# Altium PCB PCBtc.PcbDoc (part 2 of 3)
Units mm, origin at the board's own origin, x right, y up, seen from the top; angles counter-clockwise.
Board outline 94.5 x 103.5 mm, 2 copper layers (Top Layer, Bottom Layer), stack 1.671 mm thick; 71 components, 63 nets, 236 pads, 46 vias.
Unrouted connection lines stored in the file: 2.
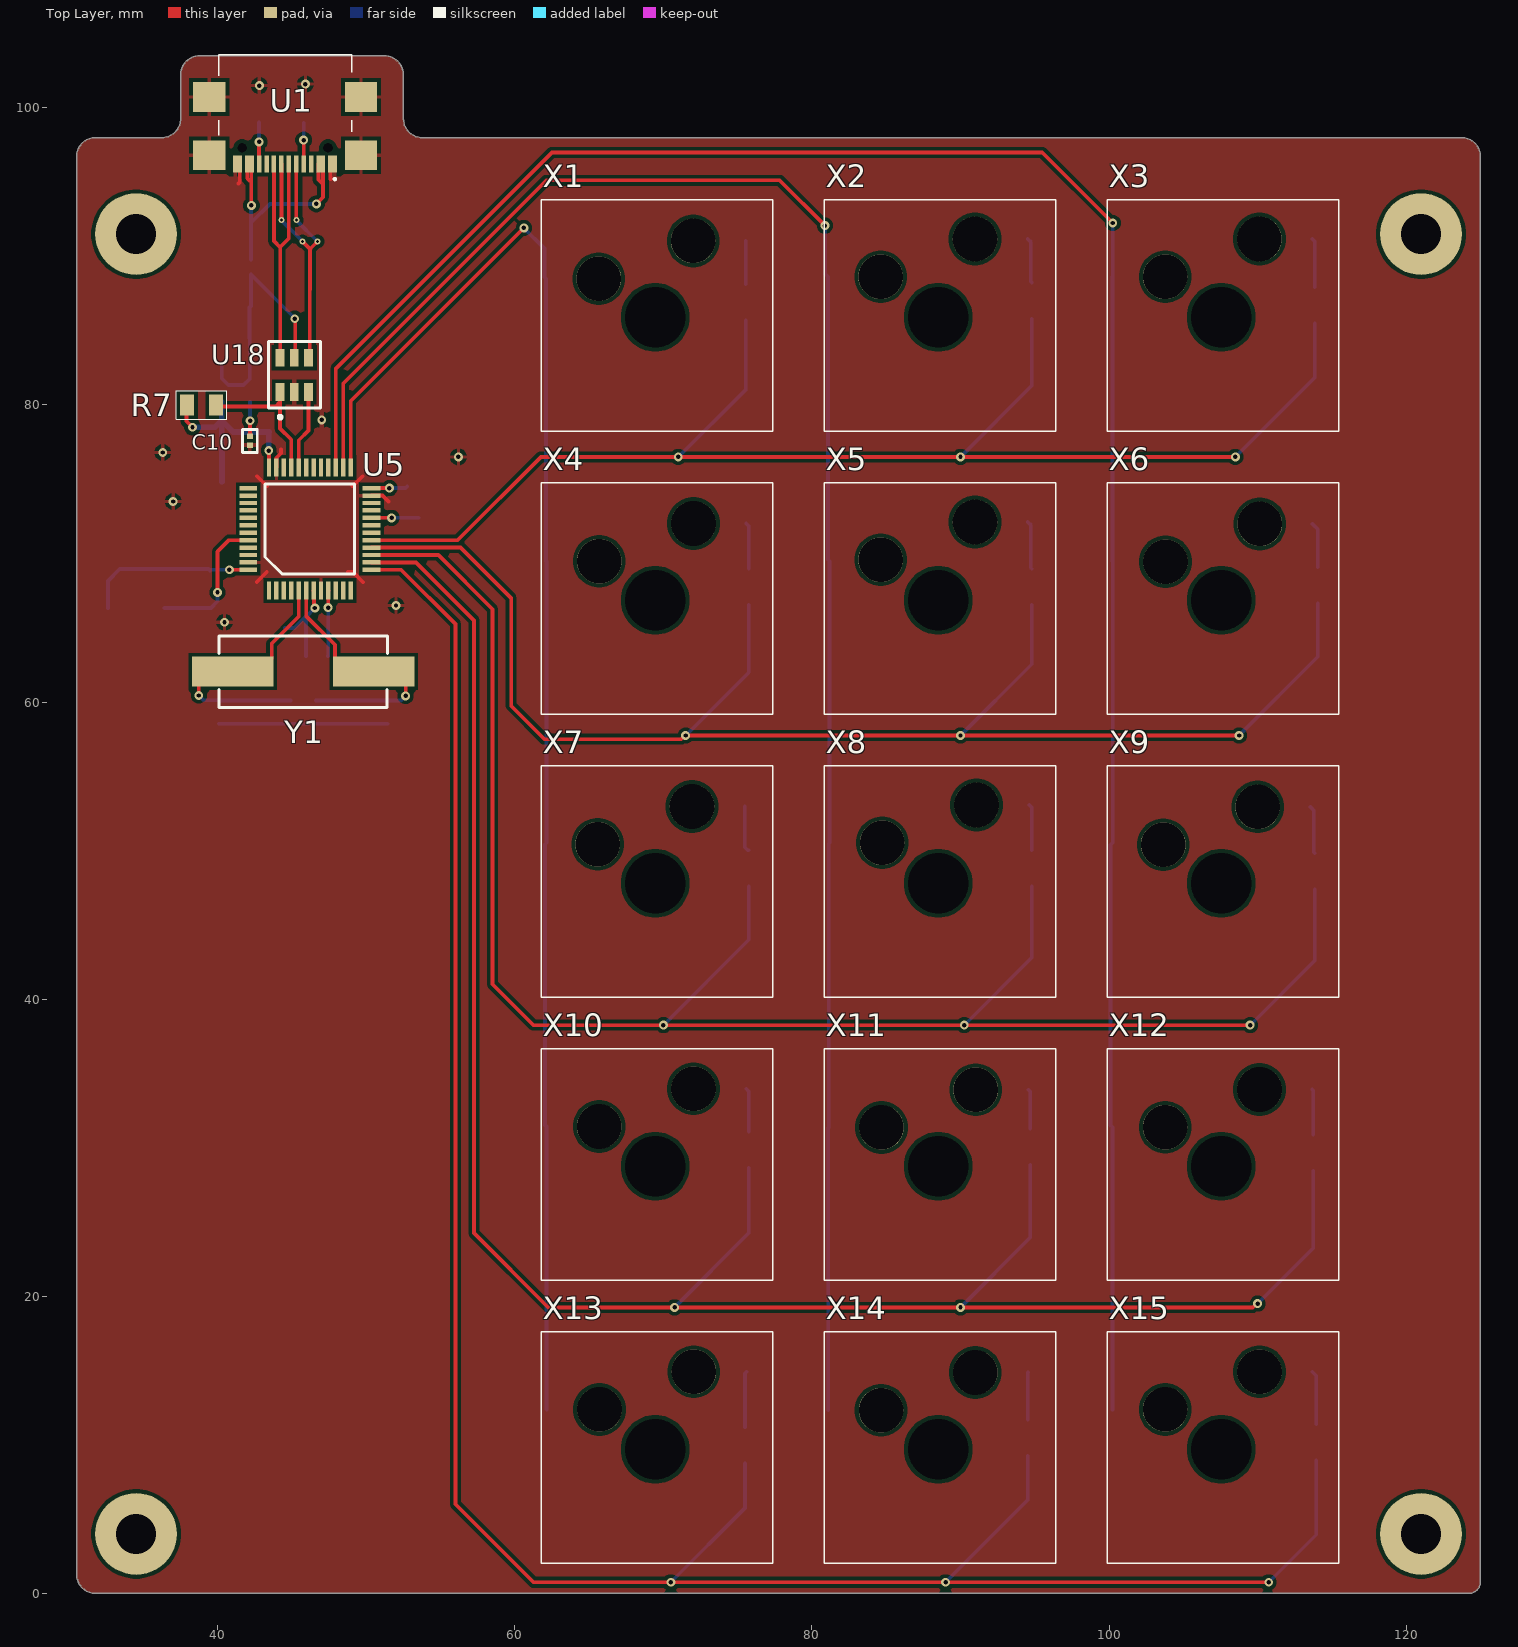
[diagram p0: Top Layer view]

## Part data (continued)
R1 R6: library part ERA-2AEB512X, "Res Thin Film 0402 5.1K Ohm 0.1% 0.063W ±25ppm/°C Molded SMD Punched Carrier T/R", Case Code (Imperial)=0402, Case Code (Metric)=1005, Manufacturer=Panasonic, Max Operating Temperature=155°C, Max Power Dissipation=63mW, Min Operating Temperature=-55°C, Supplier Part Number=P5.1KDCCT-ND, Temperature Coefficient=25ppm/°C, Tolerance=0.1%, Voltage Rating=25V, Working Voltage=50V, Case/Package=0402, Category="Chip SMD Resistors", China RoHS=Non-Compliant, ComponentLink1Description=https://datasheet.octopart.com:443/ERA-2AEB512X-Panasonic-datasheet-62287448.pdf?src-supplier=Newark, ComponentLink1URL=https://datasheet.octopart.com:443/ERA-2AEB512X-Panasonic-datasheet-62287448.pdf?src-supplier=Newark, ComponentLink2Description=https://datasheet.octopart.com:443/ERA-2AEB512X-Panasonic-datasheet-136531316.pdf?src-supplier=Newark, ComponentLink2URL=https://datasheet.octopart.com:443/ERA-2AEB512X-Panasonic-datasheet-136531316.pdf?src-supplier=Newark, ComponentLink3Description=https://datasheet.octopart.com:443/ERA-2AEB512X-Panasonic-datasheet-165151108.pdf?src-supplier=Newark, ComponentLink3URL=https://datasheet.octopart.com:443/ERA-2AEB512X-Panasonic-datasheet-165151108.pdf?src-supplier=Newark, ComponentLink4Description=https://datasheet.octopart.com:443/ERA-2AEB512X-Panasonic-datasheet-13266200.pdf?src-supplier=Future+Electronics, ComponentLink4URL=https://datasheet.octopart.com:443/ERA-2AEB512X-Panasonic-datasheet-13266200.pdf?src-supplier=Future+Electronics, ComponentLink5Description=https://datasheet.octopart.com:443/ERA-2AEB512X-Panasonic-datasheet-12510007.pdf?src-supplier=Future+Electronics, ComponentLink5URL=https://datasheet.octopart.com:443/ERA-2AEB512X-Panasonic-datasheet-12510007.pdf?src-supplier=Future+Electronics, ComponentLink6Description=https://datasheet.octopart.com:443/ERA-2AEB512X-Panasonic-datasheet-11763931.pdf?src-supplier=Future+Electronics, ComponentLink6URL=https://datasheet.octopart.com:443/ERA-2AEB512X-Panasonic-datasheet-11763931.pdf?src-supplier=Future+Electronics, ComponentLink7Description=https://datasheet.octopart.com:443/ERA-2AEB512X-Panasonic-datasheet-10840895.pdf?src-supplier=Future+Electronics, ComponentLink7URL=https://datasheet.octopart.com:443/ERA-2AEB512X-Panasonic-datasheet-10840895.pdf?src-supplier=Future+Electronics, ComponentLink8Description=https://datasheet.octopart.com:443/ERA-2AEB512X-Panasonic-datasheet-8367715.pdf?src-supplier=Future+Electronics, ComponentLink8URL=https://datasheet.octopart.com:443/ERA-2AEB512X-Panasonic-datasheet-8367715.pdf?src-supplier=Future+Electronics, ComponentLink9Description=https://datasheet.octopart.com:443/ERA-2AEB512X-Panasonic-datasheet-5392808.pdf?src-supplier=Future+Electronics, ComponentLink9URL=https://datasheet.octopart.com:443/ERA-2AEB512X-Panasonic-datasheet-5392808.pdf?src-supplier=Future+Electronics, ComponentLink10Description=https://datasheet.octopart.com:443/ERA-2AEB512X-Panasonic-datasheet-22087624.pdf?src-supplier=element14+APAC, ComponentLink10URL=https://datasheet.octopart.com:443/ERA-2AEB512X-Panasonic-datasheet-22087624.pdf?src-supplier=element14+APAC, ComponentLink11Description=https://datasheet.octopart.com:443/ERA-2AEB512X-Panasonic-datasheet-61114971.pdf?src-supplier=element14+APAC, ComponentLink11URL=https://datasheet.octopart.com:443/ERA-2AEB512X-Panasonic-datasheet-61114971.pdf?src-supplier=element14+APAC, ComponentLink12Description=https://datasheet.octopart.com:443/ERA-2AEB512X-Panasonic-datasheet-154766165.pdf?src-supplier=Master+Electronics, ComponentLink12URL=https://datasheet.octopart.com:443/ERA-2AEB512X-Panasonic-datasheet-154766165.pdf?src-supplier=Master+Electronics, ComponentLink13Description=https://datasheet.octopart.com:443/ERA2AEB512X-Panasonic-datasheet-188913046.pdf?src-supplier=TME, ComponentLink13URL=https://datasheet.octopart.com:443/ERA2AEB512X-Panasonic-datasheet-188913046.pdf?src-supplier=TME, ComponentLink14Description=https://sigma.octopart.com:443/150570796/technical_drawing/Panasonic-ERA2AEB512X.pdf?src-supplier=Panasonic+SCT, ComponentLink14URL=https://sigma.octopart.com:443/150570796/technical_drawing/Panasonic-ERA2AEB512X.pdf?src-supplier=Panasonic+SCT, ComponentLink15Description=https://datasheet.octopart.com/ERA-2AEB512X-Panasonic-datasheet-78375410.pdf, ComponentLink15URL=https://datasheet.octopart.com/ERA-2AEB512X-Panasonic-datasheet-78375410.pdf, ComponentLink16Description=https://datasheet.octopart.com:443/ERA-2AEB512X-Panasonic---ECG-datasheet-15994758.pdf?src-supplier=Farnell, ComponentLink16URL=https://datasheet.octopart.com:443/ERA-2AEB512X-Panasonic---ECG-datasheet-15994758.pdf?src-supplier=Farnell, ComponentLink17Description=https://datasheet.octopart.com:443/ERA-2AEB512X-Panasonic-datasheet-33006989.pdf?src-supplier=Electro+Sonic, ComponentLink17URL=https://datasheet.octopart.com:443/ERA-2AEB512X-Panasonic-datasheet-33006989.pdf?src-supplier=Electro+Sonic, ComponentLink18Description=https://datasheet.octopart.com:443/ERA-2AEB512X-Panasonic-datasheet-46744048.pdf?src-supplier=Electro+Sonic, ComponentLink18URL=https://datasheet.octopart.com:443/ERA-2AEB512X-Panasonic-datasheet-46744048.pdf?src-supplier=Electro+Sonic, Composition="Metal Film, Thin Film", Contact Plating=Tin, Depth=500µm, Height=350µm, Lead Free="Lead Free", Length=1mm, Lifecycle Status=Production, Manufacturer Part Number=ERA-2AEB512X, Military Standard=Not, Mounting Technology="Surface Mount", Number of Terminals=2, Number of Terminations=2, Packaging="Cut Tape", Power Dissipation=63mW, Power Rating=63mW, Pricing="1=0,1, 10=0,082, 25=0,076, 50=0,0716, 100=0,0677, 250=0,0628, 500=0,05944, 1000=0,05637, 5000=0,05032 (USD)", Radiation Hardening=No, REACH SVHC=Yes, RoHS=Compliant, Schedule B="8533210045, 8533210045|8533210045|8533210045|8533210045|8533210045", Stock=30801, Supplier=DigiKey, Termination=SMD/SMT, Voltage Rating (DC)=25V, Width=500µm
R2 R3 R4: library part CRCW060310K0FKEA, "100mW Thick Film Resistors ±1% ±100ppm/℃ 10kΩ 0603 Chip Resistor - Surface Mount ROHS", Case Code (Imperial)=0603, Manufacturer=Vishay, Max Operating Temperature=155°C, Max Power Dissipation=100mW, Min Operating Temperature=-55°C, Supplier Part Number=541-10.0KHCT-ND, Temperature Coefficient=100ppm/°C, Tolerance=1%, Voltage Rating=75V, Case/Package=0603, Category="Chip SMD Resistors", China RoHS=Non-Compliant, ComponentLink1Description=https://datasheet.octopart.com:443/CRCW060310K0FKEA-Vishay-datasheet-175423584.pdf?src-supplier=IHS, ComponentLink1URL=https://datasheet.octopart.com:443/CRCW060310K0FKEA-Vishay-datasheet-175423584.pdf?src-supplier=IHS, ComponentLink2Description=https://datasheet.octopart.com:443/CRCW060310K0FKEA-Vishay-datasheet-5300368.pdf?src-supplier=Future+Electronics, ComponentLink2URL=https://datasheet.octopart.com:443/CRCW060310K0FKEA-Vishay-datasheet-5300368.pdf?src-supplier=Future+Electronics, ComponentLink3Description=https://datasheet.octopart.com:443/CRCW060310K0FKEA-Vishay-datasheet-62316122.pdf?src-supplier=Upverter, ComponentLink3URL=https://datasheet.octopart.com:443/CRCW060310K0FKEA-Vishay-datasheet-62316122.pdf?src-supplier=Upverter, ComponentLink4Description=https://datasheet.octopart.com:443/CRCW060310K0FKEA-Vishay-datasheet-141434677.pdf?src-supplier=Upverter, ComponentLink4URL=https://datasheet.octopart.com:443/CRCW060310K0FKEA-Vishay-datasheet-141434677.pdf?src-supplier=Upverter, ComponentLink5Description=https://datasheet.octopart.com:443/CRCW060310K0FKEA-Vishay-datasheet-83961561.pdf?src-supplier=Newark, ComponentLink5URL=https://datasheet.octopart.com:443/CRCW060310K0FKEA-Vishay-datasheet-83961561.pdf?src-supplier=Newark, ComponentLink6Description=https://datasheet.octopart.com:443/CRCW060310K0FKEA-Vishay-datasheet-14722531.pdf?src-supplier=Newark, ComponentLink6URL=https://datasheet.octopart.com:443/CRCW060310K0FKEA-Vishay-datasheet-14722531.pdf?src-supplier=Newark, ComponentLink7Description=https://datasheet.octopart.com:443/CRCW060310K0FKEA-Vishay-datasheet-11516975.pdf?src-supplier=Newark, ComponentLink7URL=https://datasheet.octopart.com:443/CRCW060310K0FKEA-Vishay-datasheet-11516975.pdf?src-supplier=Newark, ComponentLink8Description=https://datasheet.octopart.com:443/CRCW060310K0FKEA-Vishay-datasheet-41302739.pdf?src-supplier=Newark, ComponentLink8URL=https://datasheet.octopart.com:443/CRCW060310K0FKEA-Vishay-datasheet-41302739.pdf?src-supplier=Newark, ComponentLink9Description=https://datasheet.octopart.com:443/CRCW060310K0FKEA-Vishay-datasheet-33013972.pdf?src-supplier=Newark, ComponentLink9URL=https://datasheet.octopart.com:443/CRCW060310K0FKEA-Vishay-datasheet-33013972.pdf?src-supplier=Newark, ComponentLink10Description=https://datasheet.octopart.com:443/CRCW060310K0FKEA-Vishay-datasheet-21226360.pdf?src-supplier=Newark, ComponentLink10URL=https://datasheet.octopart.com:443/CRCW060310K0FKEA-Vishay-datasheet-21226360.pdf?src-supplier=Newark, ComponentLink11Description=https://datasheet.octopart.com:443/CRCW060310K0FKEA-Vishay-datasheet-62317933.pdf?src-supplier=element14+APAC, ComponentLink11URL=https://datasheet.octopart.com:443/CRCW060310K0FKEA-Vishay-datasheet-62317933.pdf?src-supplier=element14+APAC, ComponentLink12Description=https://datasheet.octopart.com:443/CRCW060310K0FKEA-Vishay-datasheet-16179825.pdf?src-supplier=element14+APAC, ComponentLink12URL=https://datasheet.octopart.com:443/CRCW060310K0FKEA-Vishay-datasheet-16179825.pdf?src-supplier=element14+APAC, ComponentLink13Description=https://datasheet.octopart.com:443/CRCW060310K0FKEA-Vishay-datasheet-66077789.pdf?src-supplier=element14+APAC, ComponentLink13URL=https://datasheet.octopart.com:443/CRCW060310K0FKEA-Vishay-datasheet-66077789.pdf?src-supplier=element14+APAC, ComponentLink14Description=https://datasheet.octopart.com:443/CRCW060310K0FKEA-Vishay-datasheet-5306405.pdf?src-supplier=RS+(Formerly+Allied+Electronics), ComponentLink14URL=https://datasheet.octopart.com:443/CRCW060310K0FKEA-Vishay-datasheet-5306405.pdf?src-supplier=RS+(Formerly+Allied+Electronics), ComponentLink15Description=https://datasheet.octopart.com:443/CRCW060310K0FKEA-Vishay-Dale-datasheet-47688880.pdf?src-supplier=RS+(Formerly+Allied+Electronics), ComponentLink15URL=https://datasheet.octopart.com:443/CRCW060310K0FKEA-Vishay-Dale-datasheet-47688880.pdf?src-supplier=RS+(Formerly+Allied+Electronics), ComponentLink16Description=https://datasheet.octopart.com:443/CRCW060310K0FKEA-Vishay-datasheet-12001583.pdf?src-supplier=RS+(Formerly+Allied+Electronics), ComponentLink16URL=https://datasheet.octopart.com:443/CRCW060310K0FKEA-Vishay-datasheet-12001583.pdf?src-supplier=RS+(Formerly+Allied+Electronics), ComponentLink17Description=https://datasheet.octopart.com:443/CRCW060310K0FKEA-Vishay-datasheet-17834126.pdf?src-supplier=TME, ComponentLink17URL=https://datasheet.octopart.com:443/CRCW060310K0FKEA-Vishay-datasheet-17834126.pdf?src-supplier=TME, ComponentLink18Description=https://datasheet.octopart.com/D-CRCW-e3-Standard-Thick-Film-Chip-Resistors-Vishay-datasheet-family-64.pdf, ComponentLink18URL=https://datasheet.octopart.com/D-CRCW-e3-Standard-Thick-Film-Chip-Resistors-Vishay-datasheet-family-64.pdf, ComponentLink19Description=https://datasheet.octopart.com:443/CRCW060310K0FKEA-Vishay-datasheet-13242068.pdf?src-supplier=Farnell, ComponentLink19URL=https://datasheet.octopart.com:443/CRCW060310K0FKEA-Vishay-datasheet-13242068.pdf?src-supplier=Farnell, ComponentLink20Description=https://datasheet.octopart.com:443/CRCW060310K0FKEA-Vishay-datasheet-13195083.pdf?src-supplier=Farnell, ComponentLink20URL=https://datasheet.octopart.com:443/CRCW060310K0FKEA-Vishay-datasheet-13195083.pdf?src-supplier=Farnell, ComponentLink21Description=https://datasheet.octopart.com:443/CRCW060310K0FKEA-Vishay-datasheet-13034211.pdf?src-supplier=Farnell, ComponentLink21URL=https://datasheet.octopart.com:443/CRCW060310K0FKEA-Vishay-datasheet-13034211.pdf?src-supplier=Farnell, ComponentLink22Description=https://datasheet.octopart.com:443/CRCW060310K0FKEA-Vishay-datasheet-12600034.pdf?src-supplier=Farnell, ComponentLink22URL=https://datasheet.octopart.com:443/CRCW060310K0FKEA-Vishay-datasheet-12600034.pdf?src-supplier=Farnell, ComponentLink23Description=https://datasheet.octopart.com:443/CRCW060310K0FKEA-Vishay-datasheet-12532161.pdf?src-supplier=Farnell, ComponentLink23URL=https://datasheet.octopart.com:443/CRCW060310K0FKEA-Vishay-datasheet-12532161.pdf?src-supplier=Farnell, ComponentLink24Description=https://datasheet.octopart.com:443/CRCW060310K0FKEA-Vishay-datasheet-12517896.pdf?src-supplier=Farnell, ComponentLink24URL=https://datasheet.octopart.com:443/CRCW060310K0FKEA-Vishay-datasheet-12517896.pdf?src-supplier=Farnell, ComponentLink25Description=https://datasheet.octopart.com:443/CRCW060310K0FKEA-Vishay-datasheet-12509762.pdf?src-supplier=Farnell, ComponentLink25URL=https://datasheet.octopart.com:443/CRCW060310K0FKEA-Vishay-datasheet-12509762.pdf?src-supplier=Farnell, ComponentLink26Description=https://datasheet.octopart.com:443/CRCW060310K0FKEA-Vishay-datasheet-10322335.pdf?src-supplier=Farnell, ComponentLink26URL=https://datasheet.octopart.com:443/CRCW060310K0FKEA-Vishay-datasheet-10322335.pdf?src-supplier=Farnell, ComponentLink27Description=https://datasheet.octopart.com:443/CRCW060310K0FKEA-Vishay-datasheet-8788789.pdf?src-supplier=Farnell, ComponentLink27URL=https://datasheet.octopart.com:443/CRCW060310K0FKEA-Vishay-datasheet-8788789.pdf?src-supplier=Farnell, ComponentLink28Description=https://datasheet.octopart.com:443/CRCW060310K0FKEA-Vishay-datasheet-8361388.pdf?src-supplier=Farnell, ComponentLink28URL=https://datasheet.octopart.com:443/CRCW060310K0FKEA-Vishay-datasheet-8361388.pdf?src-supplier=Farnell, ComponentLink29Description=https://datasheet.octopart.com:443/CRCW060310K0FKEA-Vishay-datasheet-546287.pdf?src-supplier=Farnell, ComponentLink29URL=https://datasheet.octopart.com:443/CRCW060310K0FKEA-Vishay-datasheet-546287.pdf?src-supplier=Farnell, ComponentLink30Description=https://datasheet.octopart.com:443/CRCW060310K0FKEA-Vishay-datasheet-8619608.pdf?src-supplier=element14, ComponentLink30URL=https://datasheet.octopart.com:443/CRCW060310K0FKEA-Vishay-datasheet-8619608.pdf?src-supplier=element14, ComponentLink31Description=https://datasheet.octopart.com:443/CRCW060310K0FKEA-Vishay-datasheet-5377433.pdf?src-supplier=Garrett, ComponentLink31URL=https://datasheet.octopart.com:443/CRCW060310K0FKEA-Vishay-datasheet-5377433.pdf?src-supplier=Garrett, ComponentLink32Description=https://datasheet.octopart.com:443/CRCW060310K0FKEA-Vishay-datasheet-148188.pdf?src-supplier=Garrett, ComponentLink32URL=https://datasheet.octopart.com:443/CRCW060310K0FKEA-Vishay-datasheet-148188.pdf?src-supplier=Garrett, ComponentLink33Description=https://datasheet.octopart.com:443/CRCW060310K0FKEA-Vishay-datasheet-30224.pdf?src-supplier=Garrett, ComponentLink33URL=https://datasheet.octopart.com:443/CRCW060310K0FKEA-Vishay-datasheet-30224.pdf?src-supplier=Garrett, ComponentLink34Description=https://datasheet.octopart.com:443/CRCW060310K0FKEA-Vishay-datasheet-11835177.pdf?src-supplier=Arrow+Electronics, ComponentLink34URL=https://datasheet.octopart.com:443/CRCW060310K0FKEA-Vishay-datasheet-11835177.pdf?src-supplier=Arrow+Electronics, ComponentLink35Description=http://sigma.octopart.com:80/rohs_certificate/D-CRCW-e3-Standard-Thick-Film-Chip-Resistors-Vishay-family-102.pdf?src-supplier=Compliance+Statements, ComponentLink35URL=http://sigma.octopart.com:80/rohs_certificate/D-CRCW-e3-Standard-Thick-Film-Chip-Resistors-Vishay-family-102.pdf?src-supplier=Compliance+Statements, Composition="Thick Film", Contact Plating="Lead, Tin", Depth=850µm, Features="Automotive AEC-Q200", Height=450µm, Lead Free="Lead Free", Length=1.55mm, Lifecycle Status=Production, Manufacturer Part Number=CRCW060310K0FKEA, Military Standard=Not, Mounting Technology="Surface Mount", Number of Terminals=2, Number of Terminations=2, Packaging="Tape and Reel", Pins=2, Power Dissipation=100mW, Power Rating=100mW, Pricing="1=0,1, 10=0,03, 25=0,0224, 50=0,0182, 100=0,0149, 250=0,01172, 500=0,00986, 1000=0,00842 (USD)", Radiation Hardening=No, REACH SVHC=Yes, RoHS=Compliant, Schedule B="8533210045, 8533210045|8533210045|8533210045|8533210045|8533210045|8533210045|8533210045|8533210045|8533210045|8533210045|8533210045|8533210045|8533210045|8533210045|8533210045|8533210045|8533210045|8533210045|8533210045|8533210045|8533210045|8533210045|8533210045|85", Stock=1485347, Supplier=DigiKey, Termination=SMD/SMT, Voltage Rating (DC)=75V, Weight=2.012816mg, Width=850µm, Working Voltage=75V
R5: library part ERJ-3EKF1004V, "Res Thick Film 0603 1M Ohm 1% 1/10W ±100ppm/°C Molded SMD Punched Carrier T/R", Case Code (Imperial)=0603, Manufacturer=Panasonic, Max Operating Temperature=155°C, Max Power Dissipation=100mW, Min Operating Temperature=-55°C, Supplier Part Number=P1.00MHCT-ND, Temperature Coefficient=100ppm/°C, Tolerance=1%, Voltage Rating=75V, Case/Package=0603, Category="Chip SMD Resistors", China RoHS=Non-Compliant, ComponentLink1Description=https://sigma.octopart.com:443/138766958/technical_drawing/Panasonic-ERJ-3EKF1004V.pdf?src-supplier=Upverter, ComponentLink1URL=https://sigma.octopart.com:443/138766958/technical_drawing/Panasonic-ERJ-3EKF1004V.pdf?src-supplier=Upverter, ComponentLink2Description=https://datasheet.octopart.com:443/ERJ-3EKF1004V-Panasonic-datasheet-82288794.pdf?src-supplier=Future+Electronics, ComponentLink2URL=https://datasheet.octopart.com:443/ERJ-3EKF1004V-Panasonic-datasheet-82288794.pdf?src-supplier=Future+Electronics, ComponentLink3Description=https://datasheet.octopart.com:443/ERJ-3EKF1004V-Panasonic-datasheet-13266541.pdf?src-supplier=RS+(Formerly+Allied+Electronics), ComponentLink3URL=https://datasheet.octopart.com:443/ERJ-3EKF1004V-Panasonic-datasheet-13266541.pdf?src-supplier=RS+(Formerly+Allied+Electronics), ComponentLink4Description=https://datasheet.octopart.com:443/ERJ-3EKF1004V-Panasonic-datasheet-10025800.pdf?src-supplier=element14+APAC, ComponentLink4URL=https://datasheet.octopart.com:443/ERJ-3EKF1004V-Panasonic-datasheet-10025800.pdf?src-supplier=element14+APAC, ComponentLink5Description=https://datasheet.octopart.com:443/ERJ-3EKF1004V-Panasonic-datasheet-8853621.pdf?src-supplier=element14+APAC, ComponentLink5URL=https://datasheet.octopart.com:443/ERJ-3EKF1004V-Panasonic-datasheet-8853621.pdf?src-supplier=element14+APAC, ComponentLink6Description=https://datasheet.octopart.com:443/ERJ-3EKF1004V-Panasonic-datasheet-5313456.pdf?src-supplier=element14+APAC, ComponentLink6URL=https://datasheet.octopart.com:443/ERJ-3EKF1004V-Panasonic-datasheet-5313456.pdf?src-supplier=element14+APAC, ComponentLink7Description=https://datasheet.octopart.com:443/ERJ-3EKF1004V-Panasonic-datasheet-48891056.pdf?src-supplier=Newark, ComponentLink7URL=https://datasheet.octopart.com:443/ERJ-3EKF1004V-Panasonic-datasheet-48891056.pdf?src-supplier=Newark, ComponentLink8Description=https://datasheet.octopart.com:443/ERJ-3EKF1004V-Panasonic-datasheet-168681906.pdf?src-supplier=Newark, ComponentLink8URL=https://datasheet.octopart.com:443/ERJ-3EKF1004V-Panasonic-datasheet-168681906.pdf?src-supplier=Newark, ComponentLink9Description=https://datasheet.octopart.com:443/ERJ-3EKF1004V-Panasonic-datasheet-136608610.pdf?src-supplier=Farnell, ComponentLink9URL=https://datasheet.octopart.com:443/ERJ-3EKF1004V-Panasonic-datasheet-136608610.pdf?src-supplier=Farnell, ComponentLink10Description=https://datasheet.octopart.com:443/ERJ-3EKF1004V-Panasonic-datasheet-154766169.pdf?src-supplier=Master+Electronics, ComponentLink10URL=https://datasheet.octopart.com:443/ERJ-3EKF1004V-Panasonic-datasheet-154766169.pdf?src-supplier=Master+Electronics, ComponentLink11Description=https://datasheet.octopart.com:443/ERJ3EKF1004V-Panasonic-datasheet-138819429.pdf?src-supplier=Burklin+Elektronik, ComponentLink11URL=https://datasheet.octopart.com:443/ERJ3EKF1004V-Panasonic-datasheet-138819429.pdf?src-supplier=Burklin+Elektronik, ComponentLink12Description=https://datasheet.octopart.com/ERJ-3EKF1004V-Panasonic-datasheet-78375410.pdf, ComponentLink12URL=https://datasheet.octopart.com/ERJ-3EKF1004V-Panasonic-datasheet-78375410.pdf, ComponentLink13Description=https://datasheet.octopart.com:443/ERJ-3EKF1004V-Panasonic-datasheet-11542829.pdf?src-supplier=Arrow+Electronics, ComponentLink13URL=https://datasheet.octopart.com:443/ERJ-3EKF1004V-Panasonic-datasheet-11542829.pdf?src-supplier=Arrow+Electronics, ComponentLink14Description=https://datasheet.octopart.com:443/ERJ-3EKF1004V-Panasonic-datasheet-7538305.pdf?src-supplier=Jameco, ComponentLink14URL=https://datasheet.octopart.com:443/ERJ-3EKF1004V-Panasonic-datasheet-7538305.pdf?src-supplier=Jameco, ComponentLink15Description=https://datasheet.octopart.com:443/ERJ-3EKF1004V-Panasonic-datasheet-118602.pdf?src-supplier=DigiKey, ComponentLink15URL=https://datasheet.octopart.com:443/ERJ-3EKF1004V-Panasonic-datasheet-118602.pdf?src-supplier=DigiKey, ComponentLink16Description=https://datasheet.octopart.com:443/ERJ-3EKF1004V-Panasonic-datasheet-41391857.pdf?src-supplier=Electro+Sonic, ComponentLink16URL=https://datasheet.octopart.com:443/ERJ-3EKF1004V-Panasonic-datasheet-41391857.pdf?src-supplier=Electro+Sonic, Composition="Thick Film", Contact Plating=Tin, Depth=800µm, Features="Automotive AEC-Q200", Height=450µm, Lead Free="Lead Free", Length=1.6mm, Lifecycle Status=Production, Manufacturer Part Number=ERJ-3EKF1004V, Military Standard=Not, Mounting Technology="Surface Mount", Number of Terminals=2, Number of Terminations=2, Pins=2, Power Dissipation=100mW, Power Rating=100mW, Pricing="1=0,1, 10=0,034, 25=0,0256, 50=0,021, 100=0,0173, 250=0,01364, 500=0,01158, 1000=0,00995 (USD)", Radiation Hardening=No, REACH SVHC=Yes, RoHS=Compliant, Schedule B="8533210045, 8533210045|8533210045|8533210045|8533210045|8533210045|8533210045, 8533210045|8533210045|8533210045|8533210045|8533210045|8533210045|8533210045, 8533210045|8533210045|8533210045|8533210045|8533210045|8533210045|8533210045|8533210045|8533210045", Stock=52419, Supplier=DigiKey, Termination=SMD/SMT, Voltage Rating (DC)=75V, Width=800µm, Working Voltage=75V
R7: library part M55342K06B1E50RS3, "Fixed Resistor, Metal Glaze/thick Film, 0.15W, 1500ohm, 50V, 1% +/-Tol, 100ppm/Cel, Surface Mount, 0705", Case Code (Imperial)=0805, Case Code (Metric)=2012, Case/Package=0705, Manufacturer=Vishay, Max Operating Temperature=150°C, Max Power Dissipation=150mW, Min Operating Temperature=-65°C, Supplier Part Number=541-M55342K06B1E50RS3CT-ND, Temperature Coefficient=100ppm/°C, Tolerance=1%, Working Voltage=50V, Category="Chip SMD Resistors", China RoHS=Non-Compliant, ComponentLink1Description=https://datasheet.octopart.com:443/M55342K06B1E50RS3-Vishay-datasheet-159614010.pdf?src-supplier=IHS, ComponentLink1URL=https://datasheet.octopart.com:443/M55342K06B1E50RS3-Vishay-datasheet-159614010.pdf?src-supplier=IHS, ComponentLink2Description=http://sigma.octopart.com:80/rohs_statement/Vishay-company-15.pdf?src-supplier=Compliance+Statements, ComponentLink2URL=http://sigma.octopart.com:80/rohs_statement/Vishay-company-15.pdf?src-supplier=Compliance+Statements, Composition="Thick Film", Contact Plating="Lead, Tin", Depth=1.27mm, Failure Rate=0.01%, Features=Military, Height=510µm, Length=2.032mm, Lifecycle Status=Production, Manufacturer Part Number=M55342K06B1E50RS3, Military Standard=MIL-PRF-55342, Mounting Technology="Surface Mount", Number of Terminals=2, Number of Terminations=2, Packaging=Digi-Reel®, Power Dissipation=150mW, Pricing="1=1,42, 10=0,838, 25=0,7528, 50=0,74, 100=0,7082, 250=0,66168, 500=0,63208 (USD)", Radiation Hardening=No, REACH SVHC=No, RoHS=Non-Compliant, Schedule B="8533210045, 8533210045|8533210045|8533210045|8533210045|8533210045", Stock=759, Supplier=DigiKey, Width=1.27mm
S1: library part TS18-5-15-SL-160-SMT-TR, "Switch Tactile OFF (ON) SPST Round Button Gull Wing 0.05A 12VDC 80000Cycles 1.6N SMD T/R", Manufacturer="Same Sky", Supplier Part Number=2223-TS18-5-15-SL-160-SMT-TRCT-ND, Category="Tactile Switches", ComponentLink1Description=https://datasheet.octopart.com:443/TS18-5-15-SL-160-SMT-TR-Same-Sky-datasheet-188843497.pdf?src-supplier=Same+Sky, ComponentLink1URL=https://datasheet.octopart.com:443/TS18-5-15-SL-160-SMT-TR-Same-Sky-datasheet-188843497.pdf?src-supplier=Same+Sky, ComponentLink2Description=https://datasheet.octopart.com:443/TS18-5-15-SL-160-SMT-TR-Same-Sky-datasheet-181920490.pdf?src-supplier=Same+Sky, ComponentLink2URL=https://datasheet.octopart.com:443/TS18-5-15-SL-160-SMT-TR-Same-Sky-datasheet-181920490.pdf?src-supplier=Same+Sky, ComponentLink3Description=https://datasheet.octopart.com:443/TS18-5-15-SL-160-SMT-TR-CUI-Devices-datasheet-175929253.pdf?src-supplier=Same+Sky, ComponentLink3URL=https://datasheet.octopart.com:443/TS18-5-15-SL-160-SMT-TR-CUI-Devices-datasheet-175929253.pdf?src-supplier=Same+Sky, ComponentLink4Description=https://datasheet.octopart.com:443/TS18-5-15-SL-160-SMT-TR-CUI-Devices-datasheet-164366436.pdf?src-supplier=Same+Sky, ComponentLink4URL=https://datasheet.octopart.com:443/TS18-5-15-SL-160-SMT-TR-CUI-Devices-datasheet-164366436.pdf?src-supplier=Same+Sky, ComponentLink5Description=https://datasheet.octopart.com:443/TS18-5-15-SL-160-SMT-TR-CUI-Devices-datasheet-180438975.pdf?src-supplier=IHS, ComponentLink5URL=https://datasheet.octopart.com:443/TS18-5-15-SL-160-SMT-TR-CUI-Devices-datasheet-180438975.pdf?src-supplier=IHS, ComponentLink6Description=https://datasheet.octopart.com:443/TS18-5-15-SL-160-SMT-TR-Same-Sky-datasheet-182881610.pdf?src-supplier=Electro+Sonic, ComponentLink6URL=https://datasheet.octopart.com:443/TS18-5-15-SL-160-SMT-TR-Same-Sky-datasheet-182881610.pdf?src-supplier=Electro+Sonic, ComponentLink7Description=https://datasheet.octopart.com:443/TS18-5-15-SL-160-SMT-TR-Same-Sky-datasheet-189105774.pdf?src-supplier=Master+Electronics, ComponentLink7URL=https://datasheet.octopart.com:443/TS18-5-15-SL-160-SMT-TR-Same-Sky-datasheet-189105774.pdf?src-supplier=Master+Electronics, ComponentLink8Description=https://datasheet.octopart.com:443/TS18-5-15-SL-160-SMT-TR-Same-Sky-datasheet-188930973.pdf?src-supplier=TME, ComponentLink8URL=https://datasheet.octopart.com:443/TS18-5-15-SL-160-SMT-TR-Same-Sky-datasheet-188930973.pdf?src-supplier=TME, ComponentLink9Description=https://octopart.com:443/opatz8j6/c1?t=KqQziqu64Oof94FmiUg-v1zZcx-rK8_uQUNwDr2uzy2NbQps1uuKmyUbDrtFy_CDssSJIcErDHX75Ys5MpkumzxoWGo4KhLXMNYhRtSnonsxhN_CNdDrPqsbc8SxFqtwz3xKBaWuQKkbHkGvGGRF6ALid7OIyA0m_oQkKLWzqk3gbe1tIcLUqSm5UOzC-FAE6C2vcMRQTyfBlqc64UCEh4kSPYIbI5Zr4j74PpPdHNqzdRLzVeN949G-BOd3U8GEncgz5U4_BQw8HkAWMuUU45upHD5PFKjXlYlUYq-5nLKtFFdJKT8Pk-5NpzAUqV0c61kg5nU_alS4vpLGsLBGxkVf5pHzWCVdbA&src-supplier=Compliance+Statements, ComponentLink9URL=https://octopart.com:443/opatz8j6/c1?t=KqQziqu64Oof94FmiUg-v1zZcx-rK8_uQUNwDr2uzy2NbQps1uuKmyUbDrtFy_CDssSJIcErDHX75Ys5MpkumzxoWGo4KhLXMNYhRtSnonsxhN_CNdDrPqsbc8SxFqtwz3xKBaWuQKkbHkGvGGRF6ALid7OIyA0m_oQkKLWzqk3gbe1tIcLUqSm5UOzC-FAE6C2vcMRQTyfBlqc64UCEh4kSPYIbI5Zr4j74PpPdHNqzdRLzVeN949G-BOd3U8GEncgz5U4_BQw8HkAWMuUU45upHD5PFKjXlYlUYq-5nLKtFFdJKT8Pk-5NpzAUqV0c61kg5nU_alS4vpLGsLBGxkVf5pHzWCVdbA&src-supplier=Compliance+Statements, ComponentLink10Description=https://octopart.com:443/opatz8j6/c1?t=5TuQG_H1VdDI0zmpkaUogf7crYyPNVBf0k_KOzsDWrKgghMrTiwTgkJvF82Fohk73jLvzUhOiJaICJ3eYpaXQdRngcS_J_7L04GUGwDgkqFMas1KgFoMTjv4y56G33NhKN895Q6FBkrs4hLZm2-G0tTLkmjqgljZkTBtIOpsPq3bLlN0U6HwHzKbD1GQzks0LOoD9VrKmXtTzZY2G9pN7PjrFFRVOUD7x9beLLEegtBpS8dMmbJc8pCa9l4YTIJIjLovOzNrXIJHBwzob06GnXaCWsyby083_P3aNdFhgRg4M43JiNcvZ5vO-tiLFyEQi8i71cU1UqiPFy5x59SfeejwKOU9-VxF_QSYC2eKXlQDgRbrpw&src-supplier=Compliance+Statements, ComponentLink10URL=https://octopart.com:443/opatz8j6/c1?t=5TuQG_H1VdDI0zmpkaUogf7crYyPNVBf0k_KOzsDWrKgghMrTiwTgkJvF82Fohk73jLvzUhOiJaICJ3eYpaXQdRngcS_J_7L04GUGwDgkqFMas1KgFoMTjv4y56G33NhKN895Q6FBkrs4hLZm2-G0tTLkmjqgljZkTBtIOpsPq3bLlN0U6HwHzKbD1GQzks0LOoD9VrKmXtTzZY2G9pN7PjrFFRVOUD7x9beLLEegtBpS8dMmbJc8pCa9l4YTIJIjLovOzNrXIJHBwzob06GnXaCWsyby083_P3aNdFhgRg4M43JiNcvZ5vO-tiLFyEQi8i71cU1UqiPFy5x59SfeejwKOU9-VxF_QSYC2eKXlQDgRbrpw&src-supplier=Compliance+Statements, ComponentLink11Description=https://octopart.com:443/opatz8j6/c1?t=nNyksS4OFAe7rUd6DhF4K8r6o57AjeS8tI_GyJo9P6PuIf9GcO62KBbpurcikYfT6BH96f_1I3DNjWfkmWxStmMu78LfC3lHibdmNGhWdlRgMOgGC5lKJxj4UCOd6BCMq8GmeemBwRN9e-JK4HDHXjbSuReabaGsExsfZftNH5wU3LuHKFoDIaXyntNZvrQt-qG3Z_28gpmRM9jOj6RhZ-njPaOsFmLJf_ewcFJT0Yb1nPyPXqlIZEzNEZW1pe209Zcp9Cla7nz3OPw0rn2KyWR68FH1KtTO8Wzlwmo_FpOlLI2Ll_R3PetVRFYr7OKto1QpMz4ipcSxL713lRSR6rtWnWvoOYdLNkw5KFhXaF6QB9MhAhqbSL8&src-supplier=Compliance+Statements, ComponentLink11URL=https://octopart.com:443/opatz8j6/c1?t=nNyksS4OFAe7rUd6DhF4K8r6o57AjeS8tI_GyJo9P6PuIf9GcO62KBbpurcikYfT6BH96f_1I3DNjWfkmWxStmMu78LfC3lHibdmNGhWdlRgMOgGC5lKJxj4UCOd6BCMq8GmeemBwRN9e-JK4HDHXjbSuReabaGsExsfZftNH5wU3LuHKFoDIaXyntNZvrQt-qG3Z_28gpmRM9jOj6RhZ-njPaOsFmLJf_ewcFJT0Yb1nPyPXqlIZEzNEZW1pe209Zcp9Cla7nz3OPw0rn2KyWR68FH1KtTO8Wzlwmo_FpOlLI2Ll_R3PetVRFYr7OKto1QpMz4ipcSxL713lRSR6rtWnWvoOYdLNkw5KFhXaF6QB9MhAhqbSL8&src-supplier=Compliance+Statements, ComponentLink12Description=https://octopart.com:443/opatz8j6/c1?t=t126xfX2WFFDCZiHgGZKRNmSZBGca-6MUwxDoB1KZwGm-MDEXOGx3myaXTtL37PnDGe64ms3T6XxMlvLs-jqkqCJLmUpUyu_VUX8p6MyLSWy483A1_Q4GR8p4grzp1j9pRgMrP38jeXKmSKVwUa1bbGfy9rMLlm5m2edAtWTvuwpJbi33YYMGxp_LByoLvBZFUtQ1moT2PLJl7tu5UHWVp59rpSyS-dwg_BPeWniREiDzOA5h9khCPk4edCGEGtvJlfiBNw3AyjlYVnHHca_tbfztbon2n7D9TfQwcMasdfyFATPb996eGWsakBo40ZDGuiPYkqhPWhteUU_E0iBevRbUp2OzaS4Hg&src-supplier=Compliance+Statements, ComponentLink12URL=https://octopart.com:443/opatz8j6/c1?t=t126xfX2WFFDCZiHgGZKRNmSZBGca-6MUwxDoB1KZwGm-MDEXOGx3myaXTtL37PnDGe64ms3T6XxMlvLs-jqkqCJLmUpUyu_VUX8p6MyLSWy483A1_Q4GR8p4grzp1j9pRgMrP38jeXKmSKVwUa1bbGfy9rMLlm5m2edAtWTvuwpJbi33YYMGxp_LByoLvBZFUtQ1moT2PLJl7tu5UHWVp59rpSyS-dwg_BPeWniREiDzOA5h9khCPk4edCGEGtvJlfiBNw3AyjlYVnHHca_tbfztbon2n7D9TfQwcMasdfyFATPb996eGWsakBo40ZDGuiPYkqhPWhteUU_E0iBevRbUp2OzaS4Hg&src-supplier=Compliance+Statements, ComponentLink13Description=https://octopart.com:443/opatz8j6/c1?t=02Cwja4DnmEU2kvMGESJzMZfwBjjacm7rwJjDRqoW2WPG_ajbD7_Zrucpqc6ANZHQov3Pc8-1vHinTYKABVGG1ZpuwUDp7SkOc8gKQoVZ7TTg90rIjroVSqDWCSAroEx8fjttzV7V-ktWv9EgHe2sMN4RKZgebQhELuKJYz0OUvgmxWJiuCriDViNqVffVq7m80LF3vNQzeilDUPI0QZjjM_-nceRyAhJp-NiEoFegjfyvnVw17fjy6j_XJIJZus_mg8XysVjjj8tj-tWddsZx4OP2mGWhZV_vPQyNaDq7vtGQOmoHkp4aABHTUKlhwn4Fjr3vnmFHBE5sXusNA9EAFK46a8K1iDqRQ75wbKLJdatUYaQQ&src-supplier=Compliance+Statements, ComponentLink13URL=https://octopart.com:443/opatz8j6/c1?t=02Cwja4DnmEU2kvMGESJzMZfwBjjacm7rwJjDRqoW2WPG_ajbD7_Zrucpqc6ANZHQov3Pc8-1vHinTYKABVGG1ZpuwUDp7SkOc8gKQoVZ7TTg90rIjroVSqDWCSAroEx8fjttzV7V-ktWv9EgHe2sMN4RKZgebQhELuKJYz0OUvgmxWJiuCriDViNqVffVq7m80LF3vNQzeilDUPI0QZjjM_-nceRyAhJp-NiEoFegjfyvnVw17fjy6j_XJIJZus_mg8XysVjjj8tj-tWddsZx4OP2mGWhZV_vPQyNaDq7vtGQOmoHkp4aABHTUKlhwn4Fjr3vnmFHBE5sXusNA9EAFK46a8K1iDqRQ75wbKLJdatUYaQQ&src-supplier=Compliance+Statements, ComponentLink14Description=https://octopart.com:443/opatz8j6/c1?t=MWB8aWLMCEa5dTCodpc9wy5tGtv1fCscZtOe0Ybg027ASu8HEYvKHkGz5iCsi8ACwId3Q21q68zZZizw8C5z_OejLQs9i0XaiWeqn2gxUJXegKDoUl8bucjJRFstQ0igwneqP9BtOj8w93FWfGyYC4TgbuZlgACMuiKzvkAYrV37LtAgHM4g4fjLRsaGTJZQcOfhH4qSqHm8oHxIBC_zx6Pq2iEGNi_tTsU3RYYjLyf3Waj8IhmY30DzBXJF-1dvl05Mg3Dxi15a-YM8xyppGP_ZpoA8BjJmUvghSF1tHJs4sdBrrIUpFgCP80uJKUBrdh0swuitwpmiIqeC7N6_JtFY4nyt2iC9Wg96ii4EYhWJ0ljkVw3V3PQ&src-supplier=Compliance+Statements, ComponentLink14URL=https://octopart.com:443/opatz8j6/c1?t=MWB8aWLMCEa5dTCodpc9wy5tGtv1fCscZtOe0Ybg027ASu8HEYvKHkGz5iCsi8ACwId3Q21q68zZZizw8C5z_OejLQs9i0XaiWeqn2gxUJXegKDoUl8bucjJRFstQ0igwneqP9BtOj8w93FWfGyYC4TgbuZlgACMuiKzvkAYrV37LtAgHM4g4fjLRsaGTJZQcOfhH4qSqHm8oHxIBC_zx6Pq2iEGNi_tTsU3RYYjLyf3Waj8IhmY30DzBXJF-1dvl05Mg3Dxi15a-YM8xyppGP_ZpoA8BjJmUvghSF1tHJs4sdBrrIUpFgCP80uJKUBrdh0swuitwpmiIqeC7N6_JtFY4nyt2iC9Wg96ii4EYhWJ0ljkVw3V3PQ&src-supplier=Compliance+Statements, Manufacturer Part Number=TS18-5-15-SL-160-SMT-TR, Number of Positions=2, Pricing="1=0,19, 10=0,165, 25=0,1552, 100=0,1395, 250=0,1294, 500=0,12212, 1000=0,11526 (USD)", REACH SVHC=Yes, RoHS=Compliant, Stock=1247, Supplier=DigiKey
U1: library part USB4110-GF-A, "USB Connector, 16 Contact(s), Male, Right Angle, Surface Mount Terminal, Locking, Receptacle", Contact Resistance=50mΩ, Dielectric Material=Polyethylene, Insulation Resistance=100MΩ, Manufacturer="Global Connector Technology", Max Operating Temperature=85°C, Min Operating Temperature=-40°C, Supplier Part Number=2073-USB4110-GF-A-1-ND, Voltage Rating=20V, Category="USB Connectors", China RoHS=Compliant, ComponentLink1Description=https://datasheet.octopart.com:443/USB4110-GF-A-Global-Connector-Technology-datasheet-166929324.pdf?src-supplier=SOS+electronic, ComponentLink1URL=https://datasheet.octopart.com:443/USB4110-GF-A-Global-Connector-Technology-datasheet-166929324.pdf?src-supplier=SOS+electronic, ComponentLink2Description=https://datasheet.octopart.com:443/USB4110-GF-A-Global-Connector-Technology-datasheet-137417970.pdf?src-supplier=Upverter, ComponentLink2URL=https://datasheet.octopart.com:443/USB4110-GF-A-Global-Connector-Technology-datasheet-137417970.pdf?src-supplier=Upverter, ComponentLink3Description=https://datasheet.octopart.com:443/USB4110-GF-A-Global-Connector-Technology-datasheet-179886649.pdf?src-supplier=TME, ComponentLink3URL=https://datasheet.octopart.com:443/USB4110-GF-A-Global-Connector-Technology-datasheet-179886649.pdf?src-supplier=TME, ComponentLink4Description=https://datasheet.octopart.com:443/USB4110-GF-A-GCT-datasheet-188869077.pdf?src-supplier=TME, ComponentLink4URL=https://datasheet.octopart.com:443/USB4110-GF-A-GCT-datasheet-188869077.pdf?src-supplier=TME, ComponentLink5Description=https://datasheet.octopart.com:443/USB4110-GF-A-GCT-datasheet-166933377.pdf?src-supplier=TME, ComponentLink5URL=https://datasheet.octopart.com:443/USB4110-GF-A-GCT-datasheet-166933377.pdf?src-supplier=TME, Contact Gender=Male, Contact Material="Gold, Nickel", Gender=Receptacle, Height=3.46mm, Lifecycle Status=Production, Manufacturer Part Number=USB4110-GF-A, Number of Contacts=16, Number of Ports=1, Number of Rows=1, Orientation=Horizontal, Pins=16, Pricing="1=1,24, 10=1,049, 25=0,9836, 50=0,9364, 100=0,8916, 250=0,83576, 500=0,79584 (USD)", REACH SVHC=Yes, RoHS=Compliant, Shell Finish=Nickel, Shell Material="Stainless Steel", Stock=41559, Supplier=DigiKey, Terminal Pitch=500µm, USB Standard="USB 2.0"
U2 U3 U4 U6 U7 U8 U9 U10 U11 U12 U13 U14 U15 U16 U17: library part 4958, "Kailh Switch Sockets For Mx-Compatible Mechanical Keys - 20 Pack", Manufacturer="Adafruit Industries", Supplier Part Number=1528-4958-ND, Category="Switch Accessories", Manufacturer Part Number=4958, Pricing="1=4,95 (USD)", Stock=66, Supplier=DigiKey
U5: library part STM32F103C8T6, "MCU 32-bit STM32F1 ARM Cortex M3 RISC 64KB Flash 2.5V/3.3V 48-Pin LQFP Tray", Case/Package=LQFP, Clock Frequency=72MHz, Manufacturer=STMicroelectronics, Manufacturer Package Identifier=ai14911d, Max Operating Temperature=85°C, Max Power Dissipation=363mW, Max Supply Current=50mA, Max Supply Voltage=3.6V, Min Operating Temperature=-40°C, Min Supply Voltage=2V, Nominal Supply Current=1.7µA, Operating Supply Voltage=3.3V, Supplier Part Number=497-6063-ND, Address Bus Width=32b, Category=Microcontrollers, China RoHS=Compliant, Clock Rate=16MHz, ComponentLink1Description=https://datasheet.octopart.com:443/STM32F103C8T6-STMicroelectronics-datasheet-48026265.pdf?src-supplier=ICpick, ComponentLink1URL=https://datasheet.octopart.com:443/STM32F103C8T6-STMicroelectronics-datasheet-48026265.pdf?src-supplier=ICpick, ComponentLink2Description=https://datasheet.octopart.com:443/STM32F103C8T6-STMicroelectronics-datasheet-10330614.pdf?src-supplier=Newark, ComponentLink2URL=https://datasheet.octopart.com:443/STM32F103C8T6-STMicroelectronics-datasheet-10330614.pdf?src-supplier=Newark, ComponentLink3Description=https://datasheet.octopart.com:443/STM32F103C8T6-STMicroelectronics-datasheet-16839800.pdf?src-supplier=Newark, ComponentLink3URL=https://datasheet.octopart.com:443/STM32F103C8T6-STMicroelectronics-datasheet-16839800.pdf?src-supplier=Newark, ComponentLink4Description=https://datasheet.octopart.com:443/STM32F103C8T6-STMicroelectronics-datasheet-14363502.pdf?src-supplier=Farnell, ComponentLink4URL=https://datasheet.octopart.com:443/STM32F103C8T6-STMicroelectronics-datasheet-14363502.pdf?src-supplier=Farnell, ComponentLink5Description=https://datasheet.octopart.com:443/STM32F103C8T6-STMicroelectronics-datasheet-500013.pdf?src-supplier=Farnell, ComponentLink5URL=https://datasheet.octopart.com:443/STM32F103C8T6-STMicroelectronics-datasheet-500013.pdf?src-supplier=Farnell, ComponentLink6Description=https://datasheet.octopart.com:443/STM32F103C8T6-STMicroelectronics-datasheet-8365036.pdf?src-supplier=Farnell, ComponentLink6URL=https://datasheet.octopart.com:443/STM32F103C8T6-STMicroelectronics-datasheet-8365036.pdf?src-supplier=Farnell, ComponentLink7Description=https://datasheet.octopart.com:443/STM32F103C8T6-STMicroelectronics-datasheet-6396519.pdf?src-supplier=Verical, ComponentLink7URL=https://datasheet.octopart.com:443/STM32F103C8T6-STMicroelectronics-datasheet-6396519.pdf?src-supplier=Verical, ComponentLink8Description=https://datasheet.octopart.com:443/STM32F103C8T6-STMicroelectronics-datasheet-21407612.pdf?src-supplier=element14+APAC, ComponentLink8URL=https://datasheet.octopart.com:443/STM32F103C8T6-STMicroelectronics-datasheet-21407612.pdf?src-supplier=element14+APAC, ComponentLink9Description=https://datasheet.octopart.com:443/STM32F103C8T6-STMicroelectronics-datasheet-8700640.pdf?src-supplier=element14, ComponentLink9URL=https://datasheet.octopart.com:443/STM32F103C8T6-STMicroelectronics-datasheet-8700640.pdf?src-supplier=element14, ComponentLink10Description=https://datasheet.octopart.com:443/STM32F103C8T6-STMicroelectronics-datasheet-177520228.pdf?src-supplier=Burklin+Elektronik, ComponentLink10URL=https://datasheet.octopart.com:443/STM32F103C8T6-STMicroelectronics-datasheet-177520228.pdf?src-supplier=Burklin+Elektronik, ComponentLink11Description=https://datasheet.octopart.com:443/STM32F103C8T6-STMicroelectronics-datasheet-165583531.pdf?src-supplier=SOS+electronic, ComponentLink11URL=https://datasheet.octopart.com:443/STM32F103C8T6-STMicroelectronics-datasheet-165583531.pdf?src-supplier=SOS+electronic, ComponentLink12Description=https://datasheet.octopart.com:443/STM32F103C8T6-STMicroelectronics-datasheet-14106722.pdf?src-supplier=iiiC, ComponentLink12URL=https://datasheet.octopart.com:443/STM32F103C8T6-STMicroelectronics-datasheet-14106722.pdf?src-supplier=iiiC, ComponentLink13Description=https://datasheet.octopart.com:443/STM32F103C8T6-STMicroelectronics-datasheet-17594274.pdf?src-supplier=TME, ComponentLink13URL=https://datasheet.octopart.com:443/STM32F103C8T6-STMicroelectronics-datasheet-17594274.pdf?src-supplier=TME, ComponentLink14Description=https://datasheet.octopart.com:443/STM32F103C8T6-STMicroelectronics-datasheet-148251.pdf?src-supplier=Nu+Horizons, ComponentLink14URL=https://datasheet.octopart.com:443/STM32F103C8T6-STMicroelectronics-datasheet-148251.pdf?src-supplier=Nu+Horizons, Core Architecture=ARM, Data Bus Width=32b, Density=512kb, EEPROM Memory Size=0B, Flash Memory Size=64kB, Frequency=72MHz, Height=1.45mm, Height - Seated (Max)=1.6mm, Interface="CAN, USB", Lead Free="Lead Free", Length=7mm, Lifecycle Status=Production, Manufacturer Part Number=STM32F103C8T6, Memory Format=FLASH, Memory Size=64kB, Mounting Technology="Surface Mount", Number of A/D Converters=2, Number of ADC Channels=10, Number of Bits=32, Number of Channels=10, Number of I2C Channels=2, Number of I/Os=37, Number of Interrupts=16, Number of Programmable I/O=48, Number of PWM Channels=1, Number of SPI Channels=2, Number of Terminals=48, Number of Timers/Counters=4, Number of USART Channels=3, Oscillator Type=Internal, Peripherals="DMA, I2C, POR, PWM, Temp Sensor, WDT", Pins=48, Pricing="1=6,08, 10=4,662, 25=4,3084, 100=3,9192, 250=3,73372, 500=3,6219, 1000=3,5299, 2500=3,43276 (USD)", Radiation Hardening=No, RAM Size=20kB, REACH SVHC=Yes, RoHS=Compliant, Schedule B=8542310000, Stock=5599, Supplier=DigiKey, Terminal Pitch=500µm, Termination=SMD/SMT, Watchdog Timer=Yes, Width=7mm
U18: library part USBLC6-2SC6, "USBLC6 Series 2 Line 6 V Uni / Bi-Directional ESD Protection - SOT-23-6", Breakdown Voltage=6V, Case/Package=SOT-23, Clamping Voltage=17V, Forward Voltage=1.1V, Leakage Current=150nA, Manufacturer=STMicroelectronics, Max Junction Temperature (Tj)=125°C, Max Repetitive Reverse Voltage (Vrrm)=5.25V, Min Operating Temperature=-40°C, Peak Pulse Current=5A, Power Line Protection=Yes, Reverse Standoff Voltage=5V, Supplier Part Number=497-5235-1-ND, Test Current=1mA, Category="TVS Diodes", China RoHS=Compliant, ComponentLink1Description=https://datasheet.octopart.com:443/USBLC6-2SC6-STMicroelectronics-datasheet-10412581.pdf?src-supplier=Newark, ComponentLink1URL=https://datasheet.octopart.com:443/USBLC6-2SC6-STMicroelectronics-datasheet-10412581.pdf?src-supplier=Newark, ComponentLink2Description=https://datasheet.octopart.com:443/USBLC6-2SC6-STMicroelectronics-datasheet-181961833.pdf?src-supplier=Newark, ComponentLink2URL=https://datasheet.octopart.com:443/USBLC6-2SC6-STMicroelectronics-datasheet-181961833.pdf?src-supplier=Newark, ComponentLink3Description=https://datasheet.octopart.com:443/USBLC6-2SC6-STMicroelectronics-datasheet-525477.pdf?src-supplier=Factory+Futures, ComponentLink3URL=https://datasheet.octopart.com:443/USBLC6-2SC6-STMicroelectronics-datasheet-525477.pdf?src-supplier=Factory+Futures, ComponentLink4Description=https://datasheet.octopart.com:443/USBLC6-2SC6-STMicroelectronics-datasheet-82998616.pdf?src-supplier=Farnell, ComponentLink4URL=https://datasheet.octopart.com:443/USBLC6-2SC6-STMicroelectronics-datasheet-82998616.pdf?src-supplier=Farnell, ComponentLink5Description=https://datasheet.octopart.com:443/USBLC6-2SC6-STMicroelectronics-datasheet-46285.pdf?src-supplier=Farnell, ComponentLink5URL=https://datasheet.octopart.com:443/USBLC6-2SC6-STMicroelectronics-datasheet-46285.pdf?src-supplier=Farnell, ComponentLink6Description=https://datasheet.octopart.com:443/USBLC6-2SC6-STMicroelectronics-datasheet-14050643.pdf?src-supplier=iiiC, ComponentLink6URL=https://datasheet.octopart.com:443/USBLC6-2SC6-STMicroelectronics-datasheet-14050643.pdf?src-supplier=iiiC, ComponentLink7Description=https://datasheet.octopart.com:443/USBLC6-2SC6-STMicroelectronics-datasheet-10521292.pdf?src-supplier=Jameco, ComponentLink7URL=https://datasheet.octopart.com:443/USBLC6-2SC6-STMicroelectronics-datasheet-10521292.pdf?src-supplier=Jameco, Contact Plating=Tin, Data Rate=480Mbps, Depth=1.75mm, Direction=Unidirectional, Element Configuration=Dual, ESD Protection=Yes, Height=1.45mm, Lead Free="Lead Free", Length=3.05mm, Lifecycle Status=Production, Manufacturer Part Number=USBLC6-2SC6, Max Breakdown Voltage=6V, Max Operating Temperature=125°C, Max Reverse Leakage Current=150nA, Min Breakdown Voltage=6V, Mounting Technology="Surface Mount", Number of Bidirectional Channels=2, Number of Channels=2, Number of Elements=1, Number of Terminals=6, Operating Supply Voltage=1.1V, Peak Reverse Current=150nA, Pins=6, Polarity=Unidirectional, Pricing="1=0,36, 10=0,243, 100=0,163, 500=0,127, 1000=0,114 (USD)", Radiation Hardening=No, REACH SVHC=Yes, Reverse Breakdown Voltage=6V, RoHS=Compliant, Schedule B="8536300000, 8536300000|8536300000|8536300000|8536300000|8536300000|8536300000|8536300000|8536300000|8536300000|8536300000|8536300000|8536300000|8536300000|8536300000|8536300000|8536300000|8536300000|8536300000|8536300000|8536300000|8536300000|8536300000|8536300000|85", Stock=161946, Supplier=DigiKey, Termination=SMD/SMT, Width=1.75mm, Working Voltage=5V
U19: library part RT9193-33GB, "RT9193 Series 300 mA 3.3 V Ultra-Low Noise Ultra-Fast CMOS LDO Regulator-SC-70-5", Case/Package=SOT-23-5, Dropout Voltage=220mV, Manufacturer=Richtek, Max Junction Temperature (Tj)=125°C, Max Operating Temperature=85°C, Max Supply Voltage=5.5V, Min Current Limit=360mA, Min Input Voltage=4.3V, Min Operating Temperature=-40°C, Nominal Output Voltage=3.3V, Output Current=300mA, Supplier Part Number=1028-1014-1-ND, Voltage Tolerance=2%, Category="LDO Voltage Regulators", ComponentLink1Description=https://datasheet.octopart.com:443/RT9193-33GB-Richtek-datasheet-181204355.pdf?src-supplier=ODG+(Origin+Data+Global), ComponentLink1URL=https://datasheet.octopart.com:443/RT9193-33GB-Richtek-datasheet-181204355.pdf?src-supplier=ODG+(Origin+Data+Global), ComponentLink2Description=https://datasheet.octopart.com:443/RT9193-33GB-Richtek-datasheet-103962855.pdf?src-supplier=Augswan, ComponentLink2URL=https://datasheet.octopart.com:443/RT9193-33GB-Richtek-datasheet-103962855.pdf?src-supplier=Augswan, ComponentLink3Description=https://datasheet.octopart.com:443/RT9193-33GB-Richtek-datasheet-140440429.pdf?src-supplier=LKR, ComponentLink3URL=https://datasheet.octopart.com:443/RT9193-33GB-Richtek-datasheet-140440429.pdf?src-supplier=LKR, ComponentLink4Description=https://datasheet.octopart.com:443/RT9193-33GB-Richtek-datasheet-21631297.pdf?src-supplier=element14+APAC, ComponentLink4URL=https://datasheet.octopart.com:443/RT9193-33GB-Richtek-datasheet-21631297.pdf?src-supplier=element14+APAC, ComponentLink5Description=https://datasheet.octopart.com:443/RT9193-33GB-Richtek-datasheet-21405099.pdf?src-supplier=Future+Electronics, ComponentLink5URL=https://datasheet.octopart.com:443/RT9193-33GB-Richtek-datasheet-21405099.pdf?src-supplier=Future+Electronics, ComponentLink6Description=https://datasheet.octopart.com:443/RT9193-33GB-Richtek-datasheet-12517944.pdf?src-supplier=Future+Electronics, ComponentLink6URL=https://datasheet.octopart.com:443/RT9193-33GB-Richtek-datasheet-12517944.pdf?src-supplier=Future+Electronics, ComponentLink7Description=https://datasheet.octopart.com:443/RT9193-33GB-Richtek-datasheet-14171959.pdf?src-supplier=iiiC, ComponentLink7URL=https://datasheet.octopart.com:443/RT9193-33GB-Richtek-datasheet-14171959.pdf?src-supplier=iiiC, Height - Seated (Max)=1.295mm, Lead Free="Lead Free", Length=2.89mm, Lifecycle Status=Production, Manufacturer Part Number=RT9193-33GB, Mounting Technology="Surface Mount", Number of Circuits=1, Number of Outputs=1, Number of Regulators=1, Number of Terminals=5, Output Voltage=3.3V, Pins=5, Pricing="1=0,41, 10=0,283, 25=0,2516, 100=0,2178, 250=0,20156, 500=0,19182, 1000=0,18377 (USD)", REACH SVHC=Yes, RoHS=Compliant, Stock=9476, Supplier=DigiKey, Terminal Pitch=950µm, Width=1.6mm
X1 X2 X3 X4 X5 X6 X7 X8 X9 X10 X11 X12 X13 X14 X15: library part MX1A-C1NN, "Switch, Key, Spst-no, Keyboard, Low Profile, 10MA, 12VDC, Soft Tactile, Fp Mnt, Std Force", Contact Current Rating=10mA, Contact Resistance=200mΩ, Contact Voltage Rating (AC)=12V, Dielectric Material=Thermoplastic, Insulation Resistance=100MΩ, Manufacturer=Cherry, Max Operating Temperature=70°C, Min Operating Temperature=-10°C, Operating Force=589.4mN, Supplier Part Number=CH198-ND, Actuator Length=3.6mm, Actuator Material="Polyethylene, Thermoplastic", Category="Pushbutton Switches", ComponentLink1Description=https://datasheet.octopart.com:443/MX1A-C1NN-Cherry-datasheet-160429.pdf?src-supplier=Electro+Sonic, ComponentLink1URL=https://datasheet.octopart.com:443/MX1A-C1NN-Cherry-datasheet-160429.pdf?src-supplier=Electro+Sonic, ComponentLink2Description=https://datasheet.octopart.com:443/MX1A-C1NN-Cherry-datasheet-11735291.pdf?src-supplier=Electro+Sonic, ComponentLink2URL=https://datasheet.octopart.com:443/MX1A-C1NN-Cherry-datasheet-11735291.pdf?src-supplier=Electro+Sonic, ComponentLink3Description=https://datasheet.octopart.com:443/MX1A-C1NN-Cherry-datasheet-130429.pdf?src-supplier=Newark, ComponentLink3URL=https://datasheet.octopart.com:443/MX1A-C1NN-Cherry-datasheet-130429.pdf?src-supplier=Newark, ComponentLink4Description=https://datasheet.octopart.com:443/MX1A-C1NN-Cherry-datasheet-101570275.pdf?src-supplier=Newark, ComponentLink4URL=https://datasheet.octopart.com:443/MX1A-C1NN-Cherry-datasheet-101570275.pdf?src-supplier=Newark, ComponentLink5Description=https://datasheet.octopart.com:443/MX1A-C1NN-Cherry-datasheet-5391353.pdf?src-supplier=Newark, ComponentLink5URL=https://datasheet.octopart.com:443/MX1A-C1NN-Cherry-datasheet-5391353.pdf?src-supplier=Newark, ComponentLink6Description=https://datasheet.octopart.com:443/MX1AC1NN-Cherry-datasheet-137317204.pdf?src-supplier=Sager+Electronics, ComponentLink6URL=https://datasheet.octopart.com:443/MX1AC1NN-Cherry-datasheet-137317204.pdf?src-supplier=Sager+Electronics, Contact Material="Gold, Silver", Contact Plating=Gold, Current Rating=10mA, Electrical Life=20Mcycles, Housing Material=Thermoplastic, Lead Free="Lead Free", Length=15.5956mm, Manufacturer Part Number=MX1A-C1NN, Max Current Rating=10mA, Max Voltage Rating (AC)=12V, Max Voltage Rating (DC)=12V, Mechanical Life=20Mcycles, Mounting Technology="Front, Panel, Through Hole", Number of Terminals=2, Packaging=Bulk, Pricing="1=1,25 (USD)", REACH SVHC=Yes, RoHS=Compliant, Row Spacing=2.54mm, Stock=664, Supplier=DigiKey, Switch Function=Off-Mom, Terminal Pitch=6.35mm, Termination="PC Pin", Throw Configuration=SPST, Voltage Rating (AC)=12V, Voltage Rating (DC)=12V, Width=15.6mm